# Altium PCB PCB.PcbDoc
Units mm, origin at the board's own origin, x right, y up, seen from the top; angles counter-clockwise.
Board outline 45 x 60 mm, 2 copper layers (Top Layer, Bottom Layer); 29 components, 23 nets, 97 pads, 0 vias.
Unrouted connection lines stored in the file: 84.
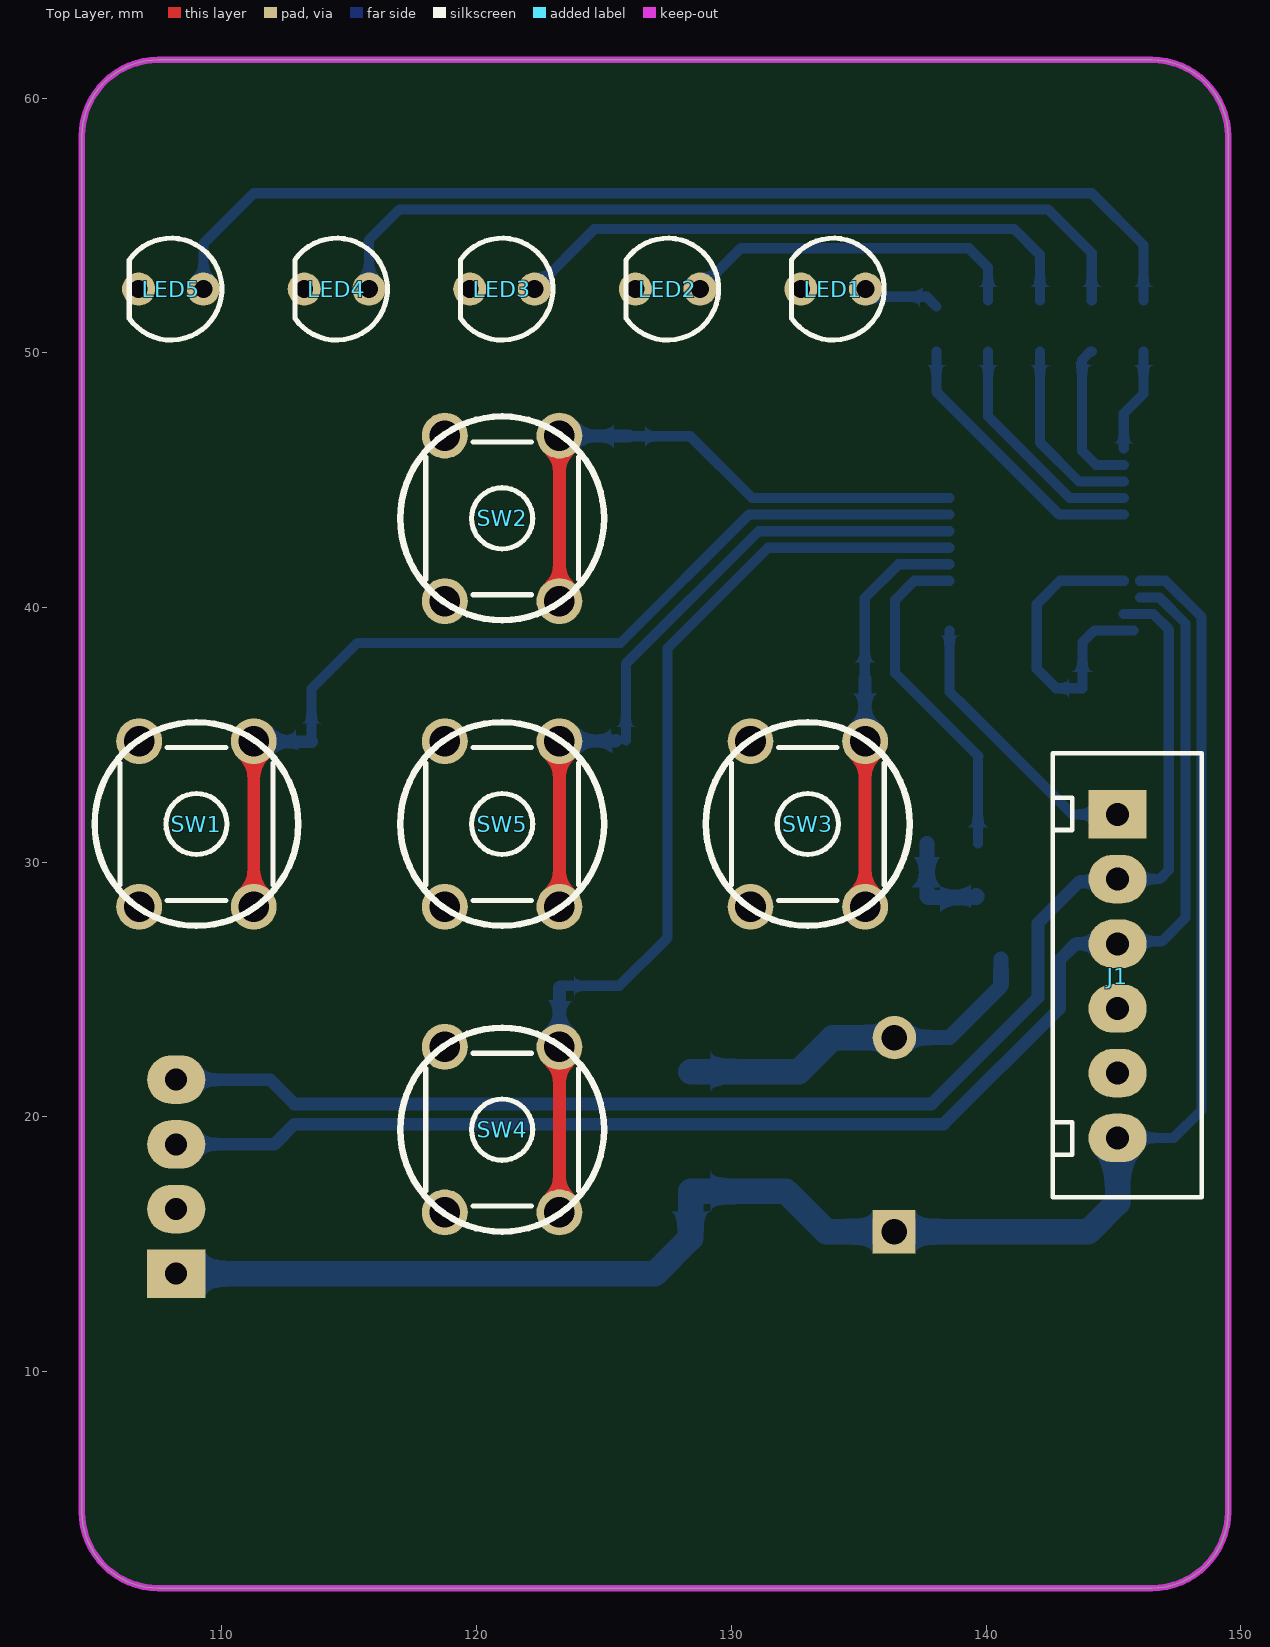
[diagram p0: Top Layer view]
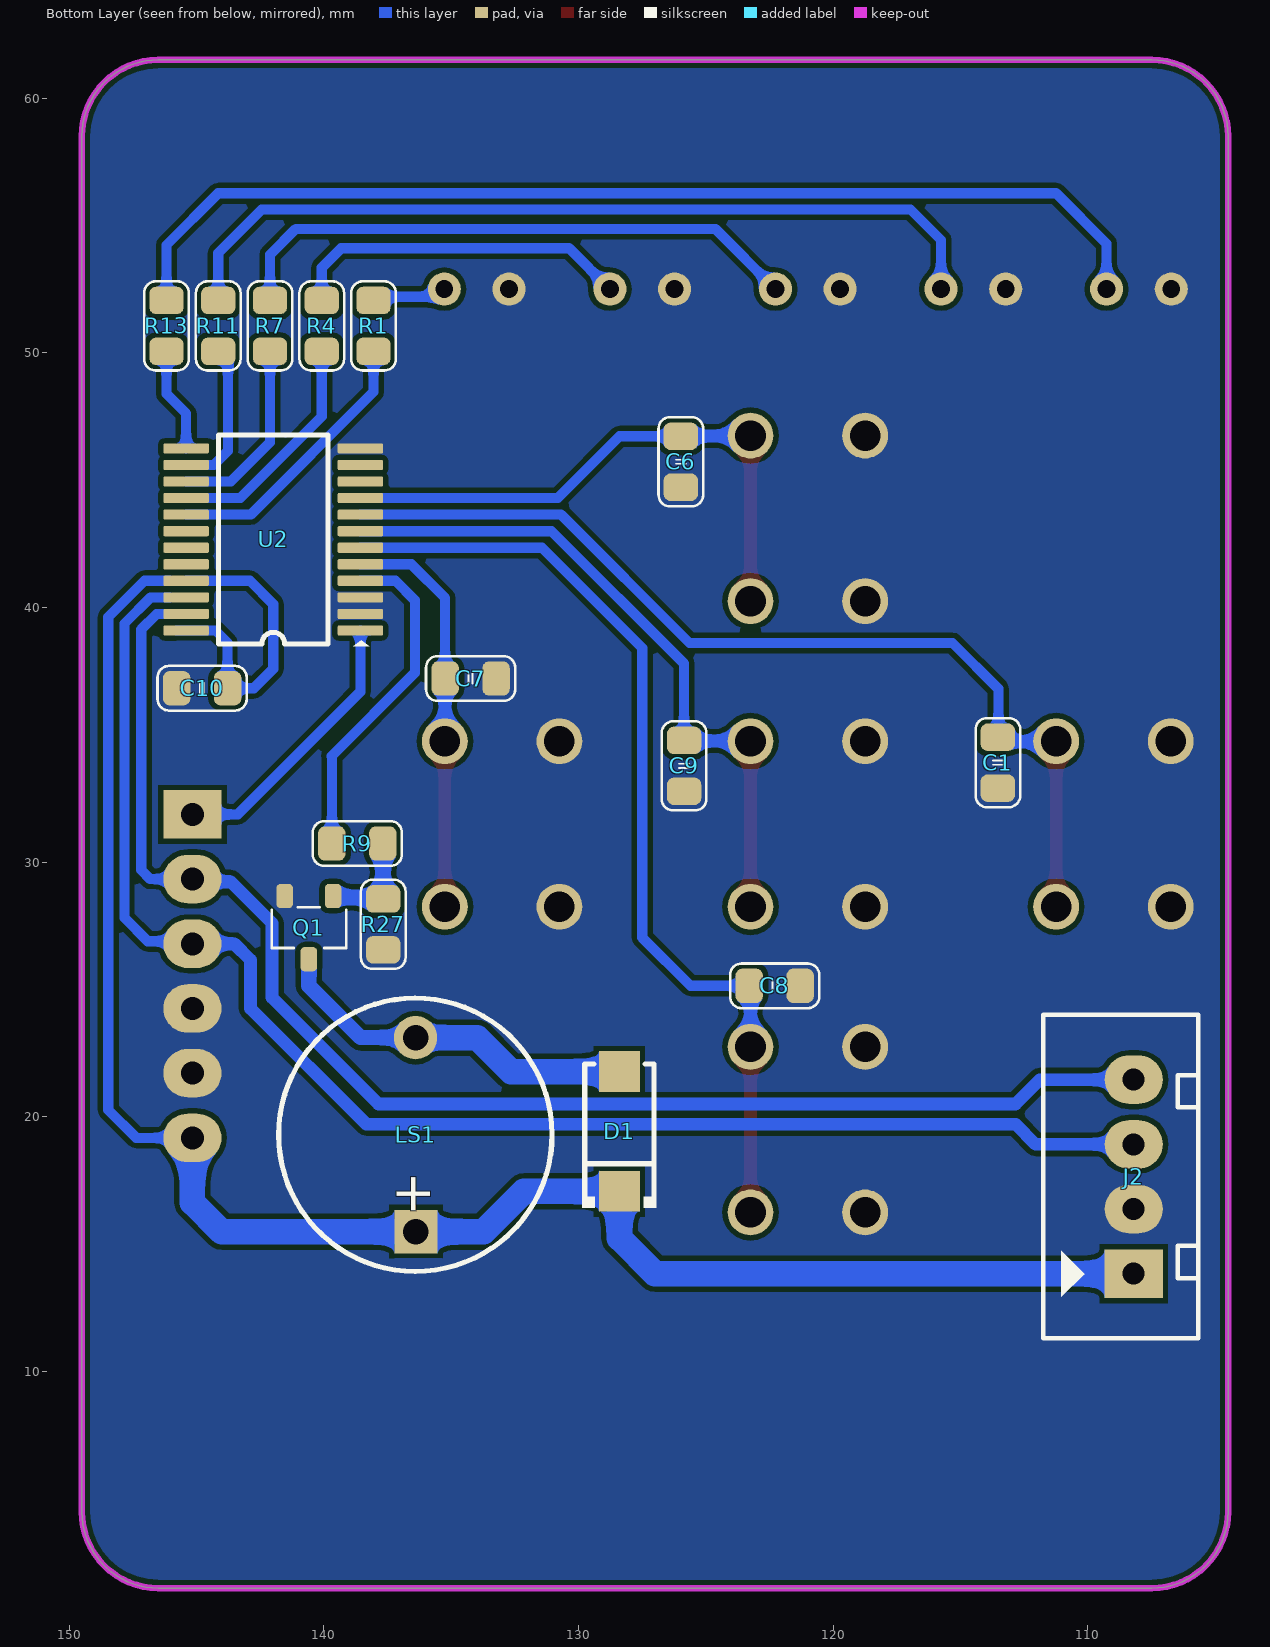
[diagram p1: Bottom Layer view, seen from below]
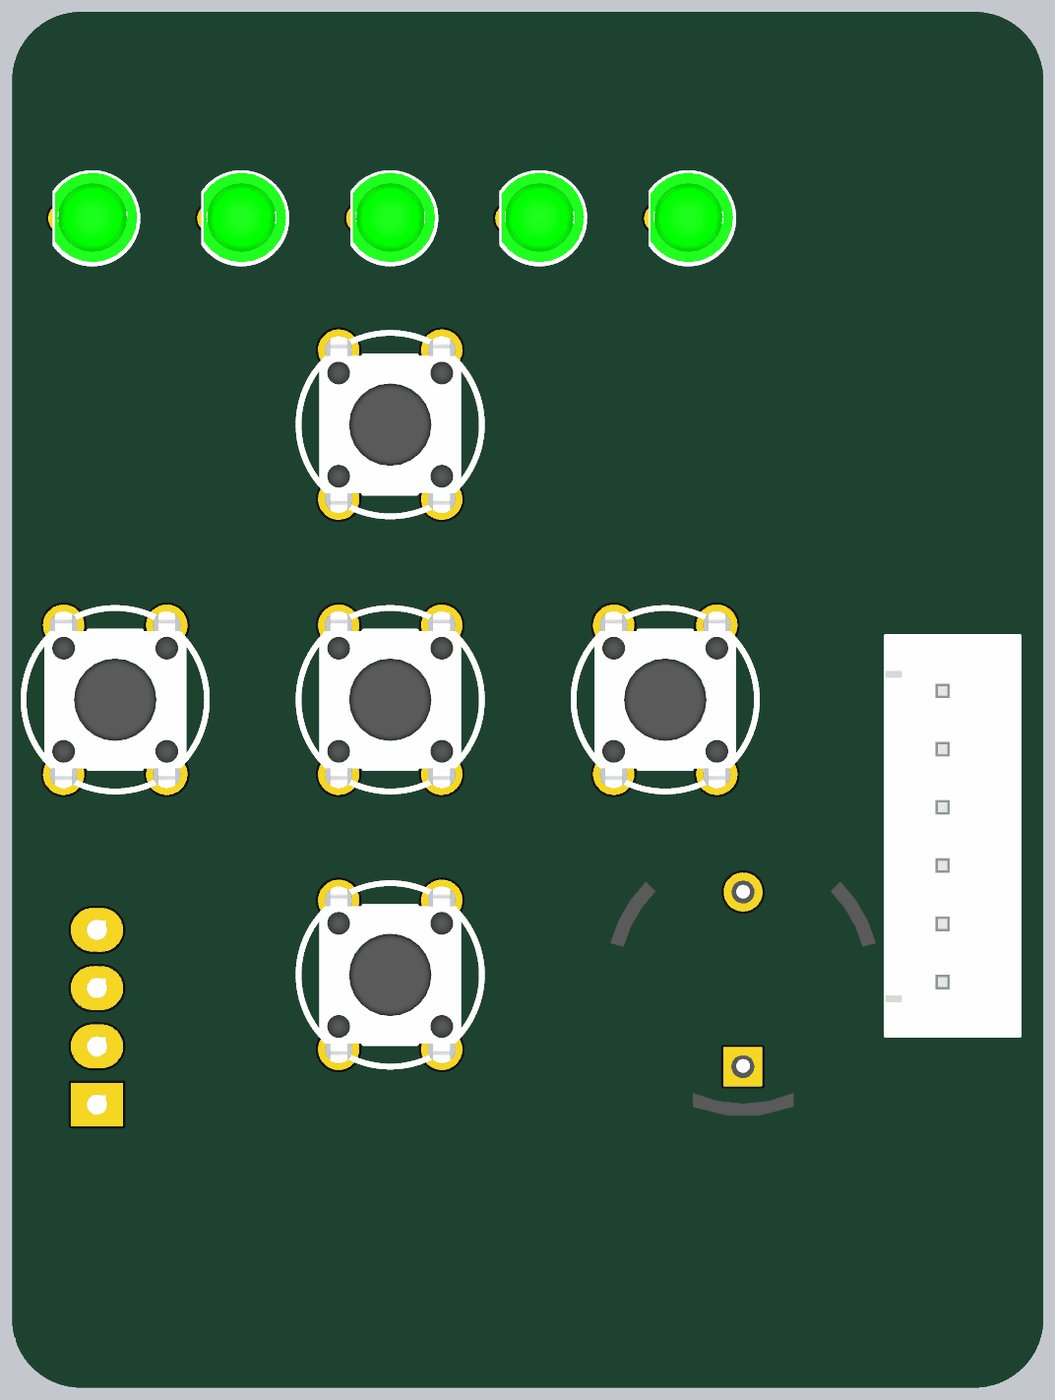
[diagram p2: 3D render of the assembled board from above, using the file's embedded part models]
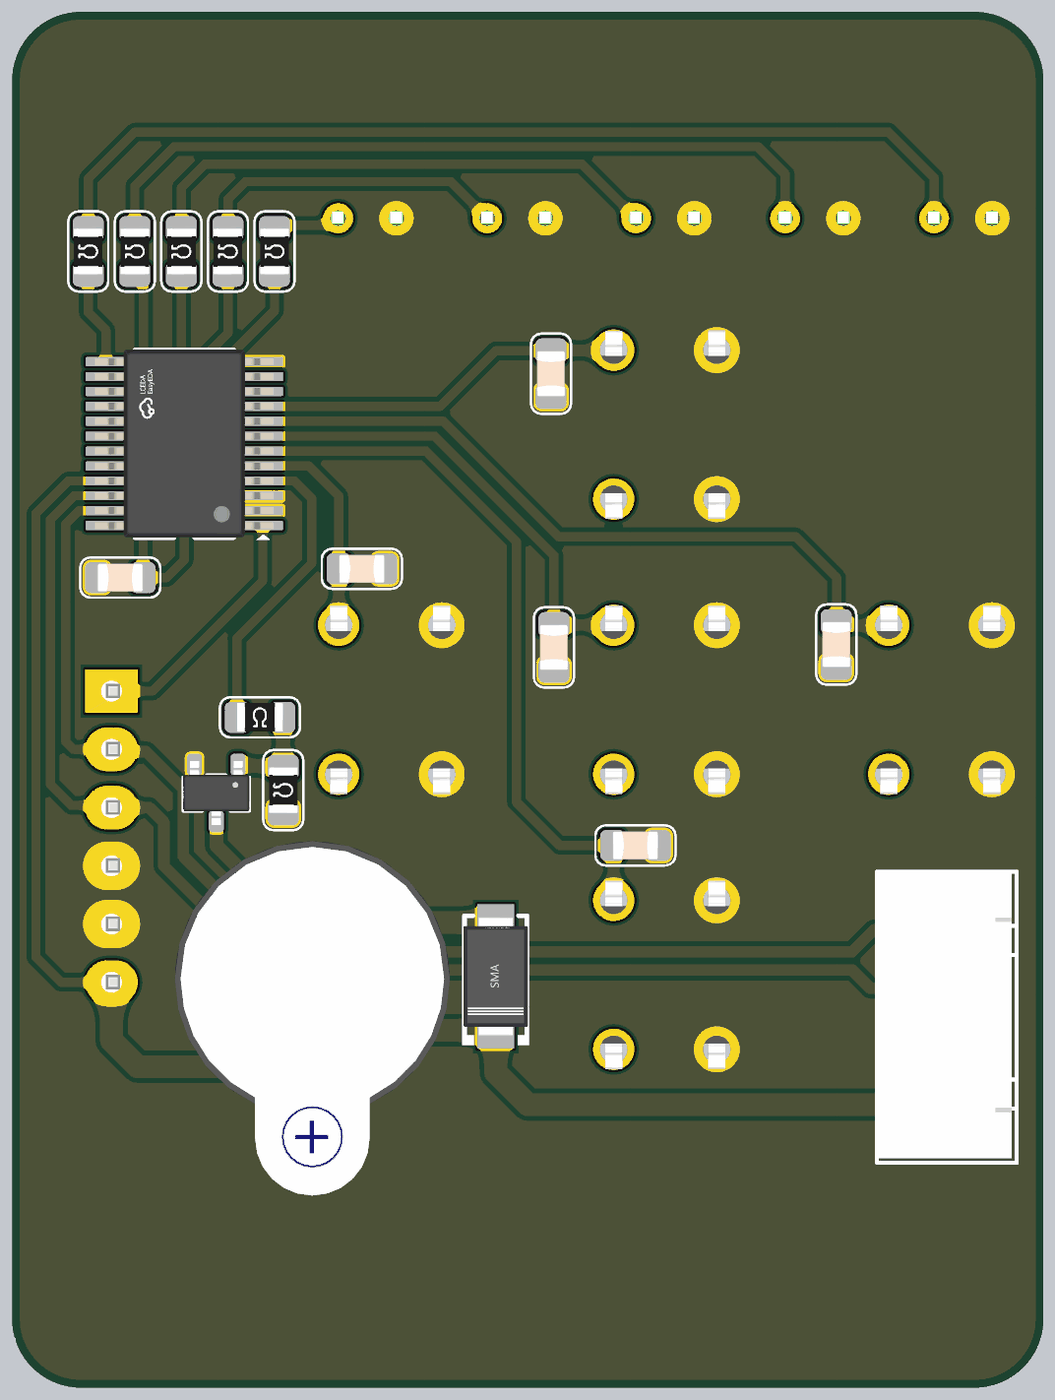
[diagram p3: 3D render of the assembled board from below, using the file's embedded part models]

## Layer stack, top to bottom
Top Solder: solder mask 0.0102, Solder Resist, Dk 3.5
Top Layer: signal copper 0.0356
Dielectric 1: dielectric 0.32, FR-4, Dk 4.8
Bottom Layer: signal copper 0.0356
Bottom Solder: solder mask 0.0102, Solder Resist, Dk 3.5

## Board outline
104.5,4.5 104.5,58.5 cw(c107.5,58.5) 107.5,61.5 146.5,61.5 cw(c146.5,58.5) 149.5,58.5 149.5,4.5 cw(c146.5,4.5) 146.5,1.5 107.5,1.5 cw(c107.5,4.5)

## Design rules (kind name [scope] priority, off if disabled: settings)
Clearance [All] p1: gap=0.2 ignorepadtopadclearanceinfootprint=FALSE
PolygonConnect [All] p1: connectstyle=Direct reliefconductorwidth=0.254 reliefentries=4 polygonreliefangle="90 Angle" airgapwidth=0.254
RoutingVias [All] p1: holewidth=0.711 width=1.27 viastyle="Through Hole" minholewidth=0.711 minwidth=1.27 maxholewidth=0.711 maxwidth=1.27
SolderMaskExpansion [All] p1: expansion=0.102 istentingtop=FALSE
SupplyNets "Schematic Supply Nets_2" [InNet('GND')] p1: voltage=0.000
SupplyNets "Schematic Supply Nets_1" [InNet('+V5P0')] p2: voltage=0.000
Width [All] p1: maxlimit=3 minlimit=0.2 preferedwidth=0.254 minimp=50.000000 maximp=50.000000 favimp=50.000000
30 further rules are at their usual default settings.

## Components (designator, comment, footprint, x,y, rotation, side; value= is the part's Value field where it differs from the comment)
C1 "100nF" CAP_SMD_0805 113.538,33.909 r270 bottom
C6 "100nF" CAP_SMD_0805 125.984,45.72 r270 bottom
C7 "100nF" CAP_SMD_0805 134.239,37.211 r180 bottom
C8 "100nF" CAP_SMD_0805 122.301,25.146 r180 bottom
C9 "100nF" CAP_SMD_0805 125.857,33.782 r270 bottom
C10 "100nF" CAP_SMD_0805 144.78,36.83 r0 bottom
D1 "M7" DIO-SMD-A 128.397,19.431 r90 bottom
J1 "XH2.54" XH2.54-6P-TH 145.161,25.527 r270 top
J2 "XH2.54-4" Header4 108.204,13.843 r90 bottom
LED1 "GREEN" LED-3MM-GREEN 134,52.5 r0 top
LED2 "GREEN" LED-3MM-GREEN 127.5,52.5 r0 top
LED3 "GREEN" LED-3MM-GREEN 121,52.5 r0 top
LED4 "GREEN" LED-3MM-GREEN 114.5,52.5 r0 top
LED5 "GREEN" LED-3MM-GREEN 108,52.5 r0 top
LS1 "Speaker" SPEAKER 136.398,23.114 r270 bottom
Q1 "AO3400" SOT23-123 140.589,27.432 r0 bottom
R1 "1k" RES_SMD_0805 138.049,51.054 r270 bottom
R4 "1k" RES_SMD_0805 140.081,51.054 r270 bottom
R7 "1k" RES_SMD_0805 142.113,51.054 r270 bottom
R9 "22R" RES_SMD_0805 138.684,30.734 r180 bottom
R11 "1k" RES_SMD_0805 144.145,51.054 r270 bottom
R13 "1k" RES_SMD_0805 146.177,51.054 r270 bottom
R27 "10k" RES_SMD_0805 137.668,27.559 r270 bottom
SW1 "SW2" SW-6X6MM 109,31.5 r270 top
SW2 "SW2" SW-6X6MM 121,43.5 r270 top
SW3 "SW2" SW-6X6MM 133,31.5 r270 top
SW4 "SW2" SW-6X6MM 121,19.5 r270 top
SW5 "SW2" SW-6X6MM 121,31.5 r270 top
U2 "PCF8575" SSOP-24-208mil 141.986,42.672 r0 bottom

## Footprints (in the part's own frame and the unit in brackets; to place one, negate y for a bottom-side part, rotate by r counter-clockwise, add the part's x,y. Pads: shape width x height; smd on the part's side, far side on the other; paste and mask are expansions set on the pad)
CAP_SMD_0805 [mm]
  rrect50% 1.08x1.35 smd: 1(-1,0) 2(1,0)
  silkscreen extent -1.75,-0.88 1.75,0.88, body extent -1,-0.63 1,0.63, height 0.81
DIO-SMD-A [mm]
  rect 1.6x1.6 smd: 1(2.35,0) 2(-2.35,0)
  silkscreen extent -3,-1.46 2.65,1.46, body extent -2.6,-1.4 2.6,1.4, height 2
Header4 [mil] "CON4"
  rect 75x90 hole 34: 1(0,0)
  oval 75x90 hole 34: 2(100,0) 3(200,0) 4(300,0)
  silkscreen extent -100,-100 400,140, body extent -92,-91 400,137, height 276
LED-3MM-GREEN [mm]
  round 1.3 hole 0.7: 1(1.27,0) 2(-1.27,0)
  silkscreen extent -1.64,-2 2,2, body extent -1.64,-1.9 1.95,1.97, height 5.3
RES_SMD_0805 [mm]
  rrect50% 1.08x1.35 smd: 1(-1,0) 2(1,0)
  silkscreen extent -1.75,-0.88 1.75,0.88, body extent -1,-0.63 1,0.63, height 0.52
SOT23-123 [mm]
  rrect50% 0.65x0.95 smd: 1(-0.95,-1.24) 2(0.95,-1.24) 3(0,1.24)
  silkscreen extent -1.46,-0.8 1.46,0.8, body extent -1.45,-1.4 1.45,1.4, height 1.1
SPEAKER [mm]
  rect 1.7x1.7 hole 1: 1(7.62,0.013)
  round 1.7 hole 1: 2(0,0)
  silkscreen extent -1.55,-5.38 9.18,5.36, body extent -2.2,-6 13.24,6, height 4.5
SSOP-24-208mil [mm]
  rrect25% 1.78x0.4 smd: 1(-3.42,3.575) 2(-3.42,2.925) 3(-3.42,2.275) 4(-3.42,1.625) 5(-3.42,0.975) 6(-3.42,0.325) 7(-3.42,-0.325) 8(-3.42,-0.975) 9(-3.42,-1.625) 10(-3.42,-2.275) 11(-3.42,-2.925) 12(-3.42,-3.575) 13(3.42,-3.575) 14(3.42,-2.925) 15(3.42,-2.275) 16(3.42,-1.625) 17(3.42,-0.975) 18(3.42,-0.325) 19(3.42,0.325) 20(3.42,0.975) 21(3.42,1.625) 22(3.42,2.275) 23(3.42,2.925) 24(3.42,3.575)
  silkscreen extent -3.76,-4.1 2.15,4.2, body extent -3.9,-4.1 3.9,4.1, height 1.95
SW-6X6MM [mm]
  round 1.8 hole 1.2: 1(-3.25,2.25) 1(3.25,2.25) 2(-3.25,-2.25) 2(3.25,-2.25)
  silkscreen extent -3,-3 3,3, body extent -4.11,-3 4.11,3, height 4.9
XH2.54-6P-TH [mm]
  rect 1.905x2.286 hole 0.9: 1(-6.35,0)
  oval 1.905x2.286 hole 0.9: 2(-3.81,0) 3(-1.27,0) 4(1.27,0) 5(3.81,0) 6(6.35,0)
  silkscreen extent -8.75,-2.54 8.68,3.3, body extent -8.7,-2.55 8.68,3.29, height 7.21

## Part data
C1 C6 C7 C8 C9 C10: library part CN, Rating=50V
D1: library part "Diode SMD", "Default Diode"
J1: library part Header6, ComponentLink1 Description=Manufacturer, ComponentLink1URL=http://www.we-online.com, ComponentLink2 Description=Datasheet, ComponentLink2URL=http://katalog.we-online.de/em/datasheet/6130xx143121.pdf
J2: library part Header4, "Header IDC, 4 x 1 Pin Vertical 2.54mm Pitch (Non-Boxed, Male)", ComponentLink1 Description=Manufacturer, ComponentLink1URL=http://www.we-online.com, ComponentLink2 Description=Datasheet, ComponentLink2URL=http://katalog.we-online.de/em/datasheet/6130xx143121.pdf
LED1 LED2 LED3 LED4 LED5: library part "LED SMD"
LS1: "Loudspeaker", LatestRevisionDate=17-Jul-2002, LatestRevisionNote="Re-released for DXP Platform.", PackageReference=PIN2, Published=24-Mar-1999, Publisher="Altium Limited"
Q1: library part FET-N
R1 R4 R7 R9 R11 R13 R27: library part Res-SMD, "Resistor", Tolerance=1%
SW1 SW2 SW3 SW4 SW5: "Switch button 2 pin", LCSC=C963349, PN=B3U-3000P
U2: "-40℃~+85℃ 10uA 16 2.5V~5.5V 25mA 300uA 400kHz 8 Cascading and address extension、Built-in LED driver I2C Interrupt Output SSOP-24-208mil I/O Expanders ROHS", LCSC=C12251, PN=PCF8575TS/1,118

## Nets (pads, with @x,y where several pads share a name; then routed paths per layer and width w, separated by ;. In a path a pad name is that pad's centre, name@x,y a point inside that pad or via, vN(x,y) a via of type N, cw(c..) or ccw(c..) an arc to the next point about the centre after c; other vN are vias at no path point)
+V5P0: C10.1 D1.2 J1.6 J2.1 LS1.1 U2.21 U2.24 | length 81
  Bottom Layer w0.4: U2.21 142.901,41.047 141.986,40.132 141.986,37.592 142.748,36.83 C10.1 143.78,38.624 144.253,39.097 U2.24@145.787,39.097 ; J1.6@145.796,19.177 147.367,19.177 148.463,20.273 148.463,39.624 147.04,41.047 U2.21@146.041,41.047
  Bottom Layer w1: J2.1 127,13.843 128.397,15.24 D1.2 132.144,17.081 133.731,15.494 144.016,15.494 145.161,16.639 J1.6
BUZZER: Q1.1 R9.2 R27.1 | length 4.1
  Bottom Layer w0.6: R9.2 137.676,30.726 137.676,28.664 137.724,28.616 139.614,28.616 139.639,28.641 Q1.1 Q1.1@139.614,28.697
ESP_I2C0_SCL: J1.3 J2.3 U2.22 | length 58.2
  Bottom Layer w0.4: J1.3@145.796,26.797 145.895,26.896 146.911,26.896 147.828,27.813 147.828,39.37 146.801,40.397 U2.22@146.041,40.397
  Bottom Layer w0.5: J2.3 112.055,18.923 112.848,19.716 138.334,19.716 142.878,24.26 142.878,26.156 143.518,26.797 J1.3 J1.3@145.796,26.797
ESP_I2C0_SDA: J1.2 J2.4 U2.23 | length 55.9
  Bottom Layer w0.4: U2.23 146.562,39.747 147.168,39.141 147.168,29.693 146.812,29.337 J1.2@145.606,29.337
  Bottom Layer w0.5: J2.4 111.887,21.463 112.842,20.508 137.856,20.508 142.034,24.686 142.034,27.607 143.663,29.236 145.06,29.236 J1.2
ESP_PCF_INT: J1.1 U2.1 | length 11.6
  Bottom Layer w0.4: U2.1 138.566,36.694 139.201,36.059 143.383,31.877 J1.1@145.796,31.877
GND: C1.2 C6.2 C7.2 C8.2 C9.2 C10.2 J1.4 J1.5 J2.2 LED1.2 LED2.2 LED3.2 LED4.2 LED5.2 Q1.2 R27.2 SW1.2 SW2.2 SW3.2 SW4.2 SW5.2 U2.2 U2.3 U2.12
LED1: R1.2 U2.17 | length 10.9
  Bottom Layer w0.4: R1.2 138.049,48.467 142.869,43.647 U2.17
LED2: R4.2 U2.16 | length 9.2
  Bottom Layer w0.4: R4.2 140.081,47.498 143.282,44.297 U2.16
LED3: R7.2 U2.15 | length 7.5
  Bottom Layer w0.4: R7.2 142.113,46.482 143.648,44.947 U2.15
LED4: R11.2 U2.14 | length 6
  Bottom Layer w0.4: R11.2 144.099,50.054 143.764,49.719 143.764,46.157 144.324,45.597 U2.14
LED5: R13.2 U2.13 | length 4.1
  Bottom Layer w0.4: U2.13 145.406,47.616 146.177,48.387 R13.2
NetD1_1: D1.1 LS1.2 Q1.3 | length 14.6
  Bottom Layer w0.6: LS1.2 138.557,23.114 140.589,25.146 Q1.3
  Bottom Layer w1: D1.1 132.652,21.781 133.985,23.114 LS1.2
NetLED1_1: LED1.1 R1.1 | length 3.1
  Bottom Layer w0.4: LED1.1 135.514,52.5 135.817,52.197 137.668,52.197 R1.1@138.049,51.816
NetLED2_1: LED2.1 R4.1 | length 13.6
  Bottom Layer w0.4: LED2.1 130.372,54.102 139.319,54.102 140.081,53.34 R4.1
NetLED3_1: LED3.1 R7.1 | length 23
  Bottom Layer w0.4: LED3.1 124.634,54.864 141.097,54.864 142.113,53.848 R7.1
NetLED4_1: LED4.1 R11.1 | length 33.4
  Bottom Layer w0.4: LED4.1 115.77,54.429 116.967,55.626 142.436,55.626 144.145,53.917 R11.1
NetLED5_1: LED5.1 R13.1 | length 42.5
  Bottom Layer w0.4: LED5.1 109.27,54.279 111.252,56.261 144.145,56.261 146.177,54.229 R13.1
NetR9_1: R9.1 U2.4 | length 13.4
  Bottom Layer w0.4: U2.4 137.186,41.047 136.426,40.287 136.426,37.437 139.7,34.163 139.684,34.147 R9.1
SW1: C1.1 SW1.1 U2.8 | length 38.7
  Top Layer w0.5: SW1.1@111.25,28.25 SW1.1@111.25,34.75
  Bottom Layer w0.4: C1.1@113.517,34.729 113.517,36.809 115.316,38.608 125.647,38.608 130.686,43.647 U2.8
  Bottom Layer w0.5: SW1.1@111.25,34.75 111.271,34.729 C1.1@113.517,34.729
SW2: C6.1 SW2.1 U2.9 | length 22.8
  Top Layer w0.5: SW2.1@123.25,40.25 SW2.1@123.25,46.75
  Bottom Layer w0.4: C6.1 128.391,46.72 130.814,44.297 U2.9
  Bottom Layer w0.5: SW2.1@123.25,46.736 C6.1@125.984,46.736
SW3: C7.1 SW3.1 U2.5 | length 16
  Top Layer w0.5: SW3.1@135.25,28.25 SW3.1@135.25,34.75
  Bottom Layer w0.4: C7.1 135.239,40.37 136.566,41.697 U2.5
  Bottom Layer w0.5: C7.1 135.244,37.206 135.244,34.756 SW3.1@135.25,34.75
SW4: C8.1 SW4.1 U2.6 | length 37.9
  Top Layer w0.5: SW4.1@123.25,16.25 SW4.1@123.25,22.75
  Bottom Layer w0.4: C8.1 125.603,25.146 127.497,27.04 127.497,38.407 131.437,42.347 U2.6
  Bottom Layer w0.5: SW4.1@123.25,22.75 C8.1@123.25,25.095
SW5: C9.1 SW5.1 U2.7 | length 26.6
  Top Layer w0.5: SW5.1@123.25,28.25 SW5.1@123.25,34.75
  Bottom Layer w0.4: C9.1 125.857,37.789 131.065,42.997 U2.7
  Bottom Layer w0.5: SW5.1@123.25,34.75 123.263,34.763 125.463,34.763 C9.1@125.476,34.775
pads on no net: U2.10 U2.11 U2.18 U2.19 U2.20

## Polygon pours and split planes (outlines as drawn)
GND on Bottom Layer "GND_L02_P000" (solid, pour order 0): 104.5,4.5 104.5,58.5 cw(c107.5,58.5) 107.5,61.5 146.5,61.5 cw(c146.5,58.5) 149.5,58.5 149.5,4.5 cw(c146.5,4.5) 146.5,1.5 107.5,1.5 cw(c107.5,4.5)

## Keep-outs
Keep-Out Layer:
  the board outline again, w0.254

## Silkscreen, mask and mechanical layers (free items; w line width, h text height)
Top Overlay:
  circle w0.254: c121,43.5 r4
  circle w0.254: c133,31.5 r4
  circle w0.254: c109,31.5 r4
  circle w0.254: c121,31.5 r4
  circle w0.254: c121,19.5 r4

## Text inside footprints (layer, text, board x,y; h text height)
LS1: Bottom Overlay "+" at 137.147,17.854 h1.52 r90